# EAGLE board MEMS-preamp_v09 (EAGLE 8.7.0)
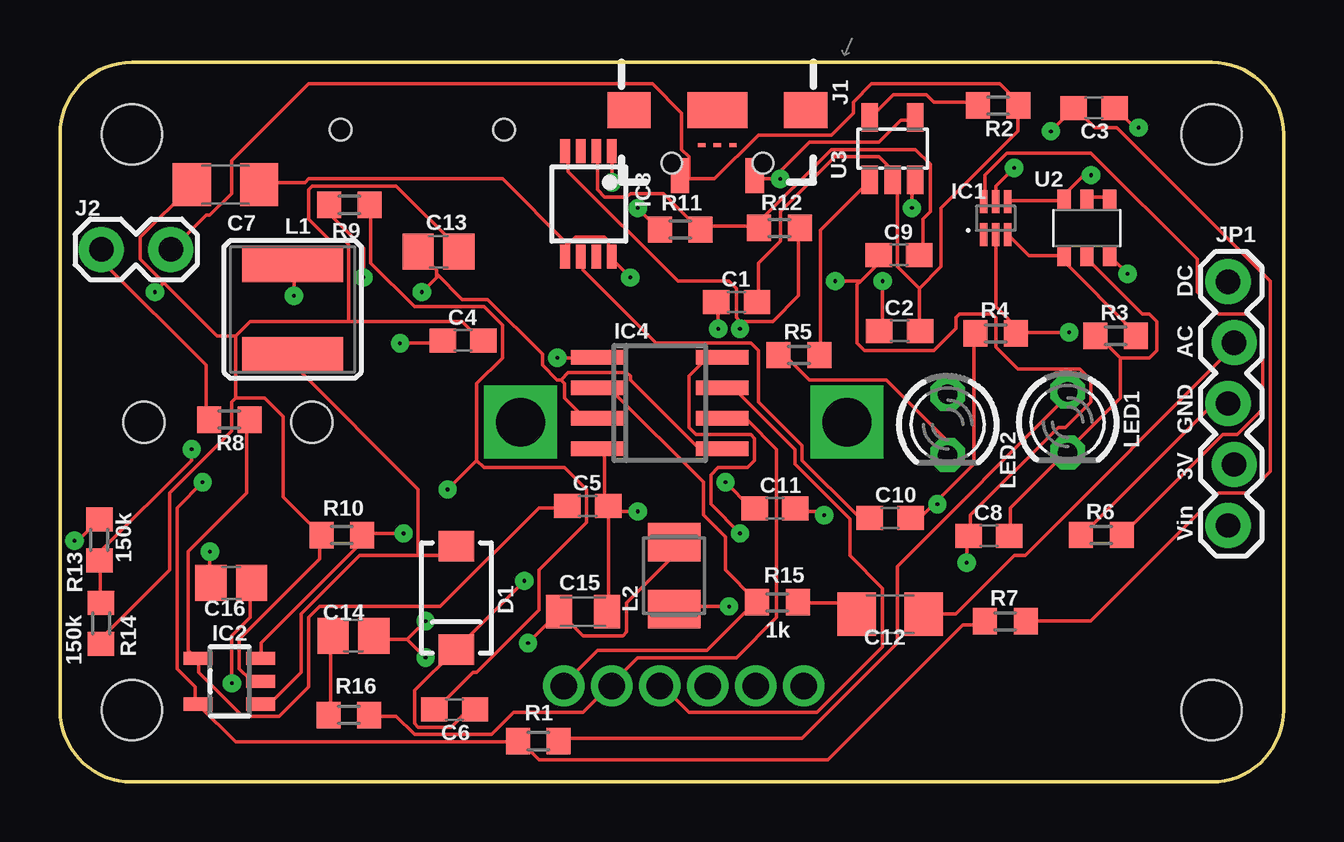
[diagram p0: board, top side]
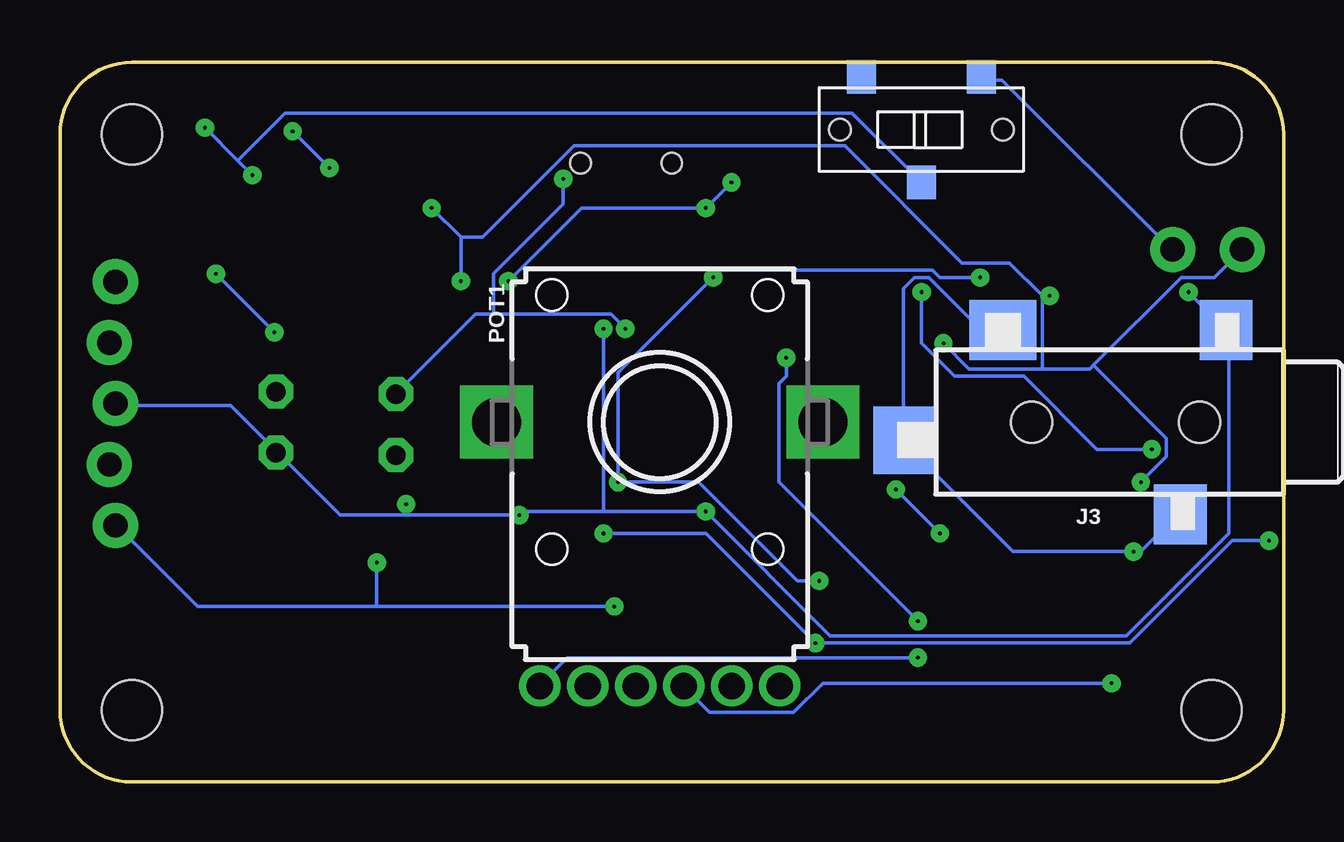
[diagram p1: board, bottom side, seen from below]

Size 51 x 30 mm. Coordinates in mm from the lower left corner, seen from the top.
Outline: 0,3 0,27 arc-90 3,30 48,30 arc-90 51,27 51,3 arc-90 48,0 3,0 arc-90 0,3
Copper layers (1*16): Top 0.035mm / dielectric 1.5mm / Bottom 0.035mm
Design rules "default *": minimum track width 6mil, minimum drill 6mil, track to track 6mil, track to pad 6mil, pad to pad 6mil, via to via 6mil, smd to smd 6mil, copper to edge 6mil, drill to drill 6mil, minimum pad ring 12mil, minimum via ring 12mil, stop-mask expansion 4mil, vias tented up to drill 0mil, thermal gap 10mil
Holes 2.5 mm at 48,27 48,3 3,27 3,3

## Footprints (pad centres in the part's own frame; a part is rotated, then mirrored left to right if it is on the bottom)
C0603 = smd 1.1 x 1: 1 -0.85,0; 2 0.85,0
C1206 = smd 1.6 x 1.8: 1 -1.4,0; 2 1.4,0
C0805 = smd 1.3 x 1.5: 1 -0.85,0; 2 0.85,0
C0805K = smd 1.1 x 1.4: 1 -1,0; 2 1,0
SMA-DIODE = smd 1.27 x 1.47: A -2.15,0; C 2.15,0
WSON-6-LONG = smd 0.3 x 0.954: 1 -0.5,-0.686; 2 0,-0.686; 3 0.5,-0.686; 4 0.5,0.686; 5 0,0.686; 6 -0.5,0.686
SOT23-5 = smd 0.55 x 1.2: 1 -0.95,-1.3; 2 0,-1.3; 3 0.95,-1.3; 4 0.95,1.3; 5 -0.95,1.3
MSOP-8 = smd 0.4 x 1: 1 -0.975,-2.2; 2 -0.325,-2.2; 3 0.325,-2.2; 4 0.975,-2.2; 5 0.975,2.2; 6 0.325,2.2; 7 -0.325,2.2; 8 -0.975,2.2
SO08 = smd 0.6 x 2.2: 1 -1.905,-2.6; 2 -0.635,-2.6; 3 0.635,-2.6; 4 1.905,-2.6; 5 1.905,2.6; 6 0.635,2.6; 7 -0.635,2.6; 8 -1.905,2.6
USB-B-MICRO-SMD_RED_PASTE = smd 0.152 x 0.305: D+ 1.455,0; D- 1.455,0.65; ID 1.455,-0.65 | smd 1.45 x 0.762: GND 2.725,-1.554 | smd 1.5 x 1.8: SHIELD1 0,3.685; SHIELD2 0,-3.685 | smd 1.5 x 2.5: SHIELD3 0,0 | smd 1.45 x 0.781: VBUS 2.725,1.554 | hole 0.85: 2.2,1.9; 2.2,-1.9
1X02_LOCK = drill 1.016 pad 1.88: 1 -0.178,0; 2 2.718,0
TRS_SJ-3524-SMT = smd 2.5 x 2.2: 1 3.85,-4.6; 3 -3.85,-2.7 | smd 2.5 x 2.8: 2 3.85,4.7 | smd 2.8 x 2.5: 4 -0.75,8.85 | hole 1.7: 0,-3.5; 0,3.5
1X05_LOCK = drill 1.016 pad 1.88: 1 0,0.127; 2 2.54,-0.127; 3 5.08,0.127; 4 7.62,-0.127; 5 10.16,0.127
CR54 = smd 4.2 x 1.4: P$1 0,1.85; P$2 0,-1.85
L3225M = smd 1.6 x 2.2: 1 -1.4,0; 2 1.4,0
LED3MM = drill 0.813 octagon: A -1.27,0; K 1.27,0
PTV112 = drill 1.1 pad 1.676: 1.1 -3,-11; 1.2 -5,-11; 1.3 5,-11; 2.1 -1,-11; 2.2 1,-11; 2.3 3,-11 | drill 2.032 pad 2.8 square: M1 -6.8,0; M2 6.8,0
R0603 = smd 1 x 1.1: 1 -0.85,0; 2 0.85,0
SWITCH_SPDT_CL-SB-12B = smd 1.2 x 1.4: P$1 -2.5,-2.2; P$2 0,2.2; P$3 2.5,-2.2 | hole 0.9: -3.4,0; 3.4,0
SOT457R_PHILIPS = smd 0.55 x 0.8: 1 -0.95,-1.2; 2 0,-1.2; 3 0.95,-1.2; 4 0.95,1.2; 5 0,1.2; 6 -0.95,1.2
SOT-23-5 = smd 0.69 x 1.2: 1 -0.95,-1.3; 2 0,-1.3; 3 0.95,-1.3; 4 0.95,1.3; 5 -0.95,1.3

## Placement (x,y rotation side)
C1  4.7uF  [C0603]  28.2,20 0 top
C2  4.7uF  [C0603]  35,18.8 0 top
C3  0.1uF  [C0603]  43.1,28.1 180 top
C4  10uF  [C0603]  16.8,18.4 0 top
C5  56nF  [C0603]  22,11.5 0 top
C6  2.2pF  [C0603]  16.45,3.02 180 top
C7  68uF  [C1206]  6.9,24.9 180 top
C8  10uF  [C0603]  38.72,10.26 0 top
C9  10nF  [C0603]  34.97,21.96 0 top
C10  10nF  [C0603]  34.6,11 0 top
C11  10uF  [C0603]  29.8,11.4 0 top
C12  10uF  [C1206]  34.6,7 180 top
C13  0.1uF  [C0805]  15.77,22.1 0 top
C14  10uF  [C0805]  12.23,6.09 180 top
C15  0.1uF  [C0805K]  21.8,7.1 0 top
C16  10uF  [C0805]  7.14,8.3 180 top
D1  B130-13-F  [SMA-DIODE]  16.53,7.67 270 top
IC1  BQ297X  [WSON-6-LONG]  39,23.5 0 top
IC2  SC4503  [SOT23-5]  7.07,4.2 90 top
IC3  TPS7A49  [MSOP-8]  22.02,24.09 180 top
IC4  OPA2134UA  [SO08]  25,15.8 270 top
J1  [USB-B-MICRO-SMD_RED_PASTE]  27.4,28 270 top
J2  Battery  [1X02_LOCK]  1.9,22.2 0 top
J3  TRS-1/8"-3.5MM  [TRS_SJ-3524-SMT]  7,15 90 bottom
JP1  ICS40300  [1X05_LOCK]  48.81,10.7 90 top
L1  2.7uH  [CR54]  9.7,19.7 0 top
L2  100uH/500mA  [L3225M]  25.6,8.6 90 top
LED1  [LED3MM]  42,15 270 top
LED2  Charge  [LED3MM]  37,14.9 270 top
POT1  20K  [PTV112]  26,15 0 bottom
R1  390  [R0603]  19.94,1.7 180 top
R2  5k  [R0603]  39.1,28.2 180 top
R3  10M  [R0603]  44,18.6 0 top
R4  10M  [R0603]  39,18.7 0 top
R5  470  [R0603]  30.8,17.8 0 top
R6  2.2k  [R0603]  43.4,10.3 0 top
R7  330  [R0603]  39.4,6.7 0 top
R8  15k  [R0603]  7.06,15.1 180 top
R9  1M  [R0603]  12.06,24.06 180 top
R10  100k  [R0603]  11.75,10.29 0 top
R11  100k  [R0603]  25.85,23.03 0 top
R12  11k  [R0603]  29.99,23.09 0 top
R13  150k  [R0603]  1.64,10.09 90 top
R14  150k  [R0603]  1.72,6.61 90 top
R15  1k  [R0603]  29.9,7.49 180 top
R16  1k  [R0603]  12.04,2.79 0 top
SW1  SPDT  [SWITCH_SPDT_CL-SB-12B]  15.1,27.2 180 bottom
U2  QS6K1  [SOT457R_PHILIPS]  42.8,23.1 0 top
U3  MCP73831  [SOT-23-5]  34.7,26.4 0 top

## Library data of the parts
C1-C12 = rcl; SPICEPREFIX: C
C13-C16 = adafruit
D1 = SparkFun
IC1-IC3 J3 R1-R16 SW1 U2 U3 = CMU-ArtFab
IC4 = linear
J1 = CMU-ArtFab; PROD_ID: CONN-11752
J2 = SparkFun-Connectors
JP1 = SparkFun-Connectors; CON1: Vin; CON2: 3V; CON3: GND; CON4: AC; CON5: DC
L1 = SparkFun-Passives
L2 = rcl; SPICEPREFIX: L
LED1 LED2 = led
POT1 = CMU-ArtFab; AVAILABILITY: Unavailable; DESCRIPTION: Alt# Tce-10111410; MF: STMicroelectronics; MP: PTV112; PACKAGE: None; PRICE: None

## Nets
+5V: C1.1 J1.VBUS LED2.A U3.4
+12V: C8.1 C9.1 IC3.1 JP1.1 L2.1 R11.1
BATGND: C3.1 IC1.4 SW1.P$2 U2.6
GND: C4.2 C5.2 C7.2 C8.2 C10.2 C11.2 C13.2 C15.2 IC2.2 IC3.4 IC4.4 J3.1 JP1.3 LED1.K R3.1 R4.1 R6.1 R10.1 R12.2 R14.1 U2.2
N$2: LED1.A R1.1
N$3: C12.1 JP1.4
N$4: C14.2 R16.1
N$5: IC4.2 POT1.1.3 R15.2
N$6: R2.2 U3.5
N$7: C16.2 J3.2 J3.3 J3.4
N$8: C13.1 IC4.3 IC4.5 R13.1 R14.2
N$9: C14.1 IC4.1 POT1.1.2
N$10: C16.1 IC4.7 POT1.2.2
N$11: U2.4 U2.5
N$12: D1.A IC2.1 L1.P$2
N$13: C5.1 IC2.4 R8.1
N$14: C6.2 IC2.3 R9.1 R10.2
N$15: C15.1 IC4.8 L2.2 R13.2
N$21: IC4.6 POT1.2.3 R16.2
N$22: LED2.K R5.1
N$23: C12.2 R15.1
N$25: R5.2 U3.1
N$27: IC1.3 R3.2 U2.1
N$31: IC1.2 R4.2 U2.3
N$34: IC1.6 R6.2
N$42: C3.2 IC1.5 R7.2
N$47: C9.2 IC3.2 R11.2 R12.1
N$48: C10.1 IC3.6
USBGND: C1.2 C2.2 J1.GND J2.2 R2.1 SW1.P$1 U3.2
V+: C6.1 C7.1 C11.1 D1.C IC3.5 IC3.8 R9.2
VBAT: C2.1 C4.1 IC2.5 J2.1 L1.P$1 R1.2 R7.1 R8.2 U3.3

## Tracks (layer width: path | path; a pad name or v marks a point on that pad's centre or on a via)
+5V  (via drill 0.15)
  Top 0.152: 29.87,25.3 29.72,25.15 28.96,25.15 J1.VBUS | 29.87,25.3 31.24,26.67 34.14,26.67 35.05,27.58 35.51,27.58 U3.4 | v27.43,18.9 27.43,19.96 C1.1 | v30.02,25.15 29.87,25.3
  Bottom 0.152: v27.43,18.9 28.04,19.51 32.92,19.51 | 32.92,19.51 33.68,19.51 36.88,16.31 LED2.A | v30.02,25.15 30.02,24.08 32.92,21.18 32.92,19.51
+12V  (via drill 0.15)
  Top 0.152: v27.89,7.32 25.6,7.32 L2.1 | v23.01,24.99 23.01,26.21 IC3.1 | v24.08,23.93 24.99,23.01 R11.1 | 33.38,20.88 33.22,20.73 33.22,18.29 33.53,17.98 36.42,17.98 37.34,18.9 37.34,19.36 37.49,19.51 38.86,19.51 39.01,19.36 39.01,18.14 39.93,17.22 42.52,17.22 42.98,16.76 42.98,15.85 41.91,14.78 41.6,14.78 37.95,11.12 37.95,10.36 C8.1 37.8,10.21 v37.8,9.14 | 33.38,20.88 33.98,21.49 33.98,21.95 C9.1 | 33.38,20.88 v32.31,20.88
  Bottom 0.152: 37.8,7.32 45.26,7.32 48.62,10.67 JP1.1 | 37.8,7.32 v27.89,7.32 | v23.01,24.99 v24.08,23.93 29.26,23.93 v32.31,20.88 | v37.8,9.14 37.8,7.32
BATGND  (via drill 0.15)
  Top 0.152: IC1.4 39.62,24.23 41.76,24.23 U2.6 41.76,24.38 42.67,25.3 v42.98,25.3 | v44.96,27.28 44.81,27.28 44.04,28.04 C3.1
  Bottom 0.152: v42.98,25.3 43.59,25.91 | 43.59,25.91 v44.96,27.28 | 43.59,25.91 41.6,27.89 17.98,27.89 15.24,25.15 SW1.P$2
GND  (via drill 0.15)
  Top 0.152: 7.32,16 7.16,15.85 7.16,14.63 4.57,12.04 4.57,8.84 1.83,6.1 1.83,5.79 R14.1 | 7.32,16 8.53,16 9.3,15.24 9.3,11.89 10.82,10.36 R10.1 10.82,10.21 10.82,9.3 7.47,5.94 7.47,4.72 7.92,4.27 8.23,4.27 IC2.2 | 12.04,19.2 7.92,19.2 7.32,18.59 | 12.04,19.2 16.76,19.2 17.53,18.44 C4.2 | 7.32,16 7.32,18.59 | 12.04,19.2 12.04,22.4 11.89,22.55 11.28,22.55 10.36,23.47 10.36,24.69 10.52,24.84 14.02,24.84 16.61,22.25 C13.2 | 4.27,20.88 6.55,18.59 7.32,18.59 | 4.27,20.88 3.35,21.79 3.35,22.71 5.49,24.84 C7.2 | v3.96,20.42 4.27,20.73 4.27,20.88 | 28.35,19.2 28.19,19.36 28.19,20.57 27.89,20.88 25.76,20.88 21.18,25.45 21.18,26.21 IC3.4 | 28.35,19.2 29.72,19.2 30.79,20.27 30.79,23.01 R12.2 | R6.1 42.67,10.36 48.01,15.7 48.62,15.7 JP1.3 | 36.58,11.73 38.1,13.26 38.1,18.59 R4.1 | 36.58,11.73 35.97,11.12 35.51,11.12 C10.2 | C5.2 22.71,11.58 22.71,13.56 22.4,13.87 IC4.4 | 22.86,11.28 22.86,11.43 C5.2 | 22.86,11.28 22.86,7.16 C15.2 | 44.2,17.68 45.41,17.68 45.72,17.98 45.72,19.2 45.41,19.51 45.11,19.51 42.82,21.79 U2.2 | 44.2,17.68 43.28,18.59 R3.1 | v31.85,11.12 31.7,11.28 30.79,11.28 C11.2 | C8.2 39.62,10.36 39.62,11.43 41.91,13.72 LED1.K 42.06,13.87 44.2,16 44.2,17.68 | v24.08,11.28 22.86,11.28 | 22.86,11.28 C5.2 | v36.58,11.58 36.58,11.73 | v28.35,18.9 28.35,19.2
  Bottom 0.152: v3.96,20.42 2.44,18.9 J3.1 2.29,18.75 2.29,10.36 6.55,6.1 18.9,6.1 v24.08,11.28 28.35,11.28 | 36.58,11.12 39.32,11.12 41.91,13.72 LED1.K 42.06,13.87 43.89,15.7 48.62,15.7 JP1.3 | 36.58,11.12 v31.85,11.12 31.7,11.28 28.35,11.28 | 36.58,11.12 v36.58,11.58 | 28.35,11.28 v28.35,18.9
N$2
  Top 0.152: R1.1 20.88,1.83 30.94,1.83 34.9,5.79 34.9,8.99 42.06,16.15 LED1.A
N$3
  Top 0.152: C12.1 36.12,7.01 37.34,7.01 39.78,9.45 40.23,9.45 49.07,18.29 JP1.4
N$4
  Top 0.152: R16.1 11.28,2.9 11.28,5.94 C14.2
N$5
  Top 0.152: POT1.1.3 21.03,4.12 22.4,5.49 26.98,5.49 28.96,7.47 R15.2 28.96,7.62 27.74,8.84 27.74,10.21 26.82,11.12 26.82,12.5 23.01,16.31 22.4,16.31 IC4.2
N$6
  Top 0.152: R2.2 38.1,28.35 36.42,28.35 36.12,28.65 34.75,28.65 33.83,27.74 U3.5
N$7  (via drill 0.15)
  Top 0.152: v6.25,9.6 6.25,8.38 C16.2
  Bottom 0.152: J3.3 4.42,11.12 5.94,9.6 v6.25,9.6 11.28,9.6 15.85,14.17 J3.4 15.85,14.33 15.85,20.57 15.39,21.03 14.78,21.03 12.65,18.9 11.73,18.9 J3.2
N$8  (via drill 0.15)
  Top 0.152: R14.2 1.68,7.47 1.68,9.14 R13.1 1.68,9.3 1.68,9.6 5.49,13.41 v5.49,13.87 | 15.7,21.18 15.7,21.34 14.94,22.1 C13.1 | 15.7,21.18 16.76,20.12 17.83,20.12 20.12,17.83 20.12,17.37 20.73,16.76 20.88,16.76 | 20.88,16.76 21.03,16.61 21.03,16 21.79,15.24 22.25,15.24 IC4.3 | v15.09,20.42 15.7,21.03 15.7,21.18 | 20.88,16.76 21.18,17.07 23.62,17.07 23.77,16.92 23.77,16.76 26.52,14.02 27.58,14.02 IC4.5
  Bottom 0.152: v5.49,13.87 7.77,13.87 10.82,16.92 13.72,16.92 15.09,18.29 v15.09,20.42
N$9  (via drill 0.15)
  Top 0.152: 14.48,5.94 13.11,5.94 C14.1 | v15.24,5.18 14.48,5.94 | v20.73,17.68 22.25,17.68 IC4.1 | 14.48,5.94 v15.24,6.71
  Bottom 0.152: v15.24,5.18 29.87,5.18 30.94,4.12 POT1.1.2 | v20.73,17.68 20.73,16.92 21.03,16.61 21.03,12.5 v15.24,6.71
N$10  (via drill 0.15)
  Top 0.152: v7.16,4.12 7.16,6.1 7.92,6.86 7.92,8.23 C16.1 | IC4.7 27.74,16.31 28.19,16.31 30.63,13.87 30.63,13.26 32.92,10.97 32.92,9.45 34.29,8.08 34.29,5.64 31.55,2.9 26.21,2.9 25.15,3.96 POT1.2.2
  Bottom 0.152: v7.16,4.12 19.2,4.12 20.42,2.9 23.93,2.9 24.99,3.96 POT1.2.2
N$11
  Top 0.152: U2.5 42.82,24.38 43.74,24.38 U2.4
N$12
  Top 0.152: 14.94,9.45 16.15,9.45 16.46,9.75 D1.A | 14.94,9.45 12.5,9.45 10.06,7.01 10.06,4.57 8.84,3.35 8.38,3.35 IC2.1 | 14.94,9.45 14.94,12.19 9.75,17.37 9.75,17.83 L1.P$2
N$13
  Top 0.152: R8.1 7.77,15.09 7.77,12.04 5.33,9.6 5.33,5.49 5.64,5.18 IC2.4 5.79,5.03 5.79,4.57 7.62,2.74 9.14,2.74 10.36,3.96 10.36,6.86 10.82,7.32 15.85,7.32 19.96,11.43 21.03,11.43 C5.1
N$14  (via drill 0.15)
  Top 0.152: IC2.3 8.38,5.18 8.38,5.79 12.5,9.91 12.5,10.21 R10.2 12.65,10.36 v14.33,10.36 | 17.37,13.41 17.68,13.11 21.03,13.11 21.95,12.19 21.95,10.82 19.96,8.84 19.96,7.16 17.37,4.57 17.22,4.57 15.7,3.05 C6.2 | 17.37,13.41 17.37,16.61 18.44,17.68 18.44,19.05 17.68,19.81 14.78,19.81 12.95,21.64 12.95,23.93 R9.1 | 17.37,13.41 v16.15,12.19
  Bottom 0.152: v16.15,12.19 v14.33,10.36
N$15  (via drill 0.15)
  Top 0.152: v0.61,10.06 0.76,10.06 1.52,10.82 R13.2 | v19.51,5.79 20.73,7.01 C15.1 20.88,7.01 21.79,6.1 23.47,6.1 23.62,6.25 23.62,7.47 25.45,9.3 25.45,9.91 L2.2 | v28.35,10.36 27.13,11.58 27.13,12.8 27.43,13.11 28.65,13.11 28.96,13.41 28.96,14.33 28.8,14.48 26.52,14.48 26.21,14.78 26.21,16.92 26.98,17.68 27.58,17.68 IC4.8
  Bottom 0.152: v0.61,10.06 2.13,10.06 6.4,5.79 v19.51,5.79 24.08,10.36 v28.35,10.36
N$21
  Top 0.152: R16.2 12.95,2.74 14.02,2.74 14.78,1.98 17.98,1.98 18.9,2.9 21.79,2.9 22.86,3.96 POT1.2.3 23.01,4.12 24.08,5.18 28.19,5.18 29.87,6.86 29.87,13.87 28.65,15.09 27.74,15.09 IC4.6
N$22
  Top 0.152: R5.1 30.02,17.68 30.33,17.68 31.24,16.76 34.44,16.76 36.88,14.33 36.88,13.72 LED2.K
N$23
  Top 0.152: R15.1 30.79,7.47 32.61,7.47 33.07,7.01 C12.2
N$25
  Top 0.152: R5.2 31.7,17.83 31.7,23.01 33.68,24.99 U3.1
N$27
  Top 0.152: IC1.3 39.62,22.71 40.39,21.95 41.76,21.95 U2.1 41.76,21.79 44.81,18.75 R3.2
N$31  (via drill 0.15)
  Top 0.152: v44.5,21.18 43.89,21.79 U2.3 | 40.08,18.75 39.93,18.75 R4.2 40.08,18.75 | 40.08,18.75 v42.06,18.75 | 40.08,18.75 39.01,19.81 39.01,22.71 IC1.2
  Bottom 0.152: v42.06,18.75 v44.5,21.18
N$34
  Top 0.152: IC1.6 38.56,24.23 38.56,25.3 39.47,26.21 42.98,26.21 47.4,21.79 47.4,20.42 48.31,19.51 49.53,19.51 50.14,18.9 50.14,15.54 49.07,14.48 48.46,14.48 44.35,10.36 R6.2
N$42  (via drill 0.15)
  Top 0.152: v39.78,25.6 39.01,24.84 39.01,24.23 IC1.5 | v41.3,27.13 42.22,28.04 C3.2 42.37,28.04 43.13,27.28 44.04,27.28 50.44,20.88 50.44,12.95 49.53,12.04 48.31,12.04 42.98,6.71 40.39,6.71 R7.2
  Bottom 0.152: v41.3,27.13 v39.78,25.6
N$47
  Top 0.152: IC3.2 22.4,26.21 22.4,24.69 22.71,24.38 23.62,24.38 23.77,24.54 25.15,24.54 26.67,23.01 R11.2 26.82,23.16 28.96,23.16 | 28.96,23.16 29.11,23.16 R12.1 28.96,23.16 | 28.96,23.16 32.16,26.36 35.66,26.36 36.27,25.76 36.27,23.77 35.97,23.47 35.97,22.1 C9.2
N$48
  Top 0.152: IC3.6 21.79,21.79 21.79,21.34 24.84,18.29 28.8,18.29 29.11,17.98 29.11,15.85 30.94,14.02 30.94,13.41 33.22,11.12 33.68,11.12 C10.1
USBGND
  Top 0.152: 35.81,20.57 35.81,18.9 C2.2 | 35.81,20.57 34.9,21.49 34.9,24.84 34.75,24.99 U3.2 34.59,25.15 34.59,25.6 34.14,26.06 32.31,26.06 30.02,23.77 30.02,22.55 29.11,21.64 29.11,20.12 C1.2 | 35.81,20.57 36.73,21.49 36.73,23.93 39.93,27.13 39.93,28.19 R2.1 39.93,28.35 39.17,29.11 33.83,29.11 33.07,28.35 33.07,27.89 32.16,26.98 29.11,26.98 27.28,25.15 26.21,25.15 | 26.21,25.15 25.91,25.15 J1.GND 26.21,25.15 | 26.21,25.15 26.21,26.06 25.91,26.36 25.91,27.89 24.69,29.11 10.36,29.11 7.16,25.91 7.16,24.54 6.25,23.62 6.1,23.62 4.72,22.25 J2.2
  Bottom 0.152: SW1.P$1 12.5,29.26 11.73,29.26 4.72,22.25 J2.2
V+  (via drill 0.15)
  Top 0.152: C6.1 17.22,2.9 16.92,2.9 16.31,2.29 14.94,2.29 14.78,2.44 14.78,3.81 16.46,5.49 D1.C 16.61,5.64 v19.36,8.38 | 21.18,22.4 21.18,21.95 IC3.5 | 21.18,22.4 21.49,22.71 22.71,22.71 22.86,22.55 22.86,21.95 IC3.8 23.01,21.79 v23.77,21.03 | v27.74,12.5 28.8,11.43 C11.1 | v12.65,21.03 12.65,22.25 11.28,23.62 11.28,23.93 R9.2 | 21.18,22.4 18.44,25.15 10.36,25.15 10.21,24.99 8.38,24.99 C7.1
  Bottom 0.152: v12.65,21.03 14.33,21.03 14.63,21.34 23.47,21.34 v23.77,21.03 27.74,17.07 v27.74,12.5 24.38,12.5 20.27,8.38 v19.36,8.38
VBAT  (via drill 0.15)
  Top 0.152: R7.1 38.41,6.55 37.64,6.55 32,0.91 19.96,0.91 19.2,1.68 R1.2 19.05,1.68 7.32,1.68 5.79,3.2 IC2.5 5.64,3.35 5.64,3.96 4.88,4.72 4.88,11.43 v5.94,12.5 | v34.29,20.88 34.29,18.9 C2.1 | v35.51,23.93 35.51,24.99 U3.3 | R8.2 6.1,15.24 6.1,17.37 1.83,21.64 1.83,22.1 J2.1 | v14.17,18.29 15.85,18.29 C4.1 | v9.75,20.27 9.75,21.49 L1.P$1
  Bottom 0.152: 34.29,22.71 v34.29,20.88 | v35.51,23.93 34.29,22.71 | v14.17,18.29 13.11,17.22 10.06,17.22 | 10.06,17.22 8.08,17.22 7.92,17.37 | 7.92,17.37 4.27,21.03 2.9,21.03 1.83,22.1 J2.1 | 34.29,22.71 33.38,22.71 29.57,26.52 18.29,26.52 13.41,21.64 11.43,21.64 10.06,20.27 | 10.06,17.22 10.06,20.27 | 10.06,20.27 v9.75,20.27 | v5.94,12.5 4.88,13.56 4.88,14.33 7.92,17.37

## Text on the board
bValues: ON | OFF